# EAGLE board Simulación del circuito eléctrico mixto (EAGLE 9.7.0)

Size 69.97 x 117.11 mm. Coordinates in mm from the lower left corner, seen from the top.
Outline: 0,0 69.97,0 69.97,117.11 0,117.11 0,0
Copper layers (1*16): Top 0.035mm / dielectric 1.5mm / Bottom 0.035mm
Design rules "default": minimum track width 6mil, minimum drill 0.35mm, track to track 6mil, track to pad 6mil, pad to pad 6mil, via to via 6mil, smd to smd 6mil, copper to edge 40mil, drill to drill 6mil, minimum pad ring 10mil, minimum via ring 8mil, stop-mask expansion 4mil, vias tented up to drill 0mil, thermal gap 10mil

## Footprints (pad centres in the part's own frame; a part is rotated, then mirrored left to right if it is on the bottom)
BATTERY-GENERIC = drill 1.118 pad 3.15 octagon: + 2.54,0; - -2.54,0
RESAD1016W63L850D250B = drill 0.83 pad 1.43: 1 -5.08,0; 2 5.08,0

## Placement (x,y rotation side)
P1  BATTERYGENERIC  [BATTERY-GENERIC]  61.71,108.85 180 top
R1  150  [RESAD1016W63L850D250B]  8.97,21.34 0 top
R2  300  [RESAD1016W63L850D250B]  9.16,6.33 0 top
R3  180  [RESAD1016W63L850D250B]  33.66,21.14 0 top
R4  120  [RESAD1016W63L850D250B]  58.16,21.14 0 top
RR1  150  [RESAD1016W63L850D250B]  9.46,71.65 0 top
RR2  300  [RESAD1016W63L850D250B]  9.36,52.84 0 top
RR3  180  [RESAD1016W63L850D250B]  31.03,71.24 0 top
RR4  120  [RESAD1016W63L850D250B]  51.97,71.19 0 top

## Library data of the parts
P1 R1-R4 RR1-RR4 = Tinkercad

## Nets
P1+: P1.+ RR1.1 RR2.1
R1_2: R1.2 R2.2 R3.1
R2_1: R1.1 R2.1
R3_2: R3.2 R4.1
RR2_2: RR1.2 RR2.2 RR3.1
RR3_2: RR3.2 RR4.1

## Tracks (layer width: path | path; a pad name or v marks a point on that pad's centre or on a via)
P1+  (2 unrouted)
R1_2  (2 unrouted)
R2_1  (1 unrouted)
R3_2  (1 unrouted)
RR2_2  (2 unrouted)
RR3_2  (1 unrouted)